# Altium PCB A10-OLinuXino-LIME.PcbDoc
Units mm, origin at the board's own origin, x right, y up, seen from the top; angles counter-clockwise.
Board outline 83.9 x 59.56 mm, 2 copper layers (Top Layer, Bottom Layer), stack 1.671 mm thick; 6 components, 0 nets, 36 pads, 0 vias.
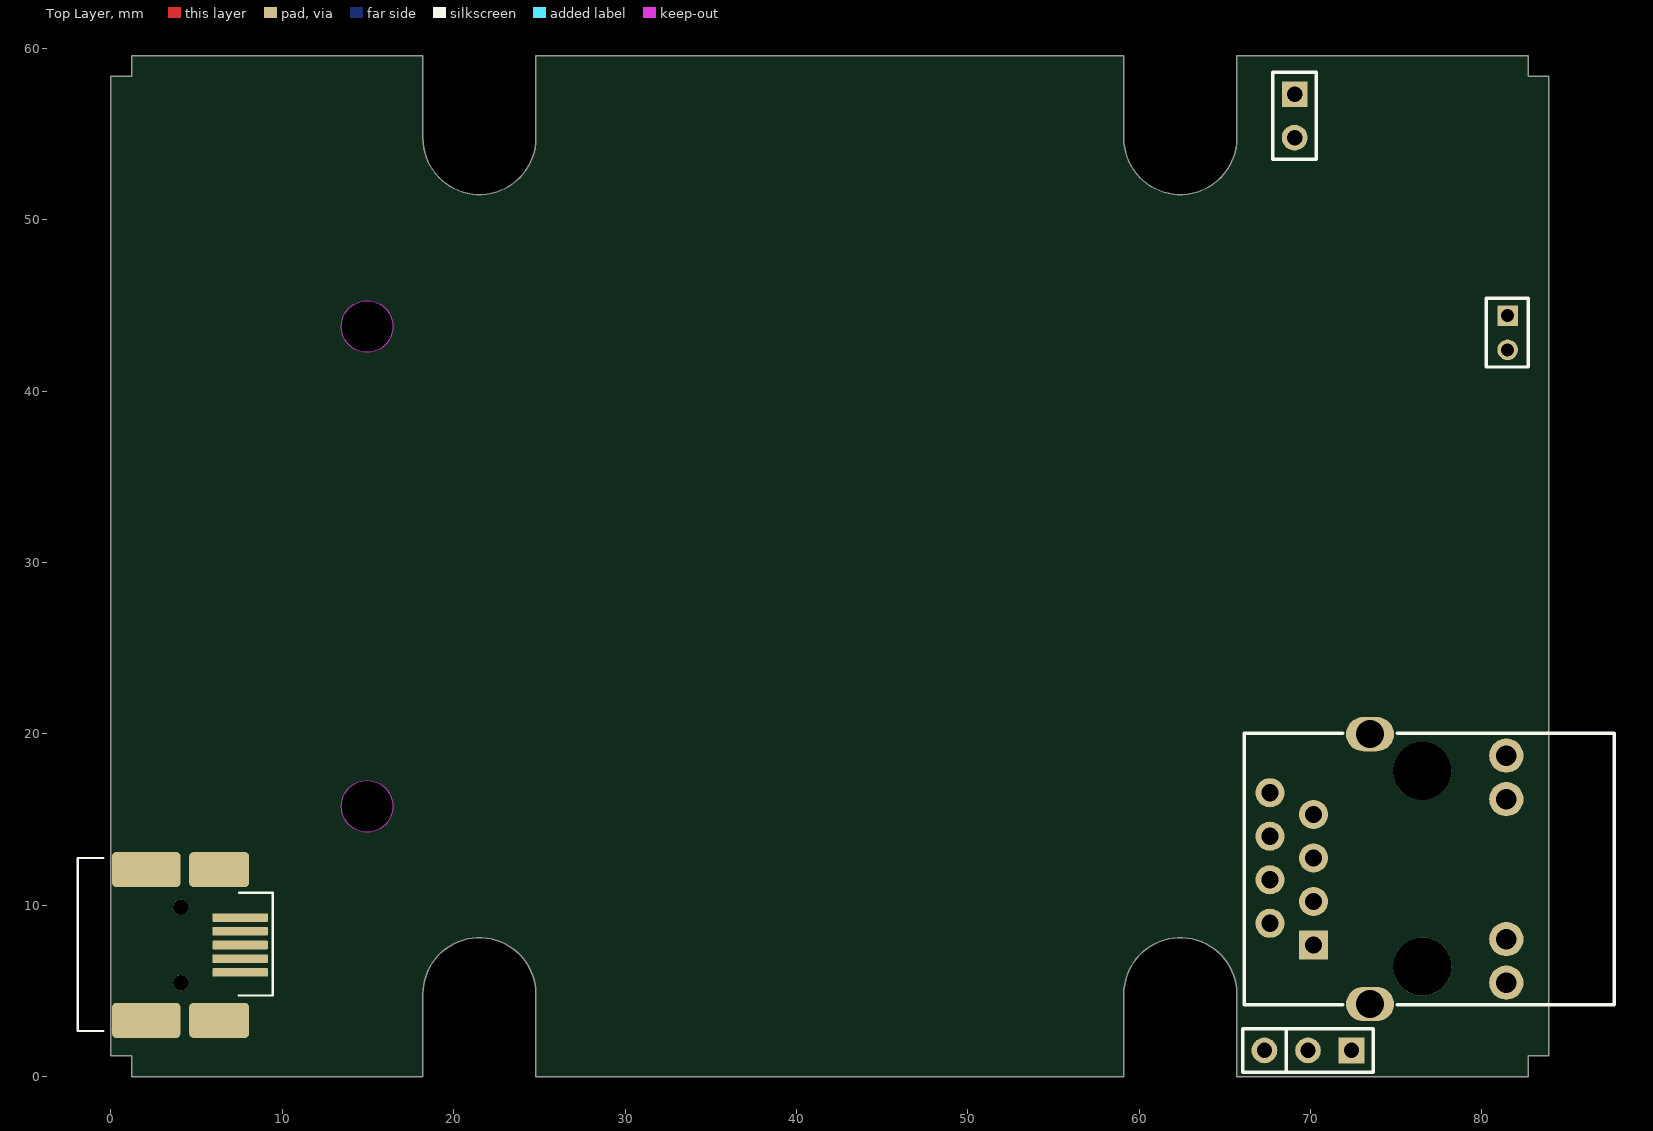
[diagram p0: Top Layer view]
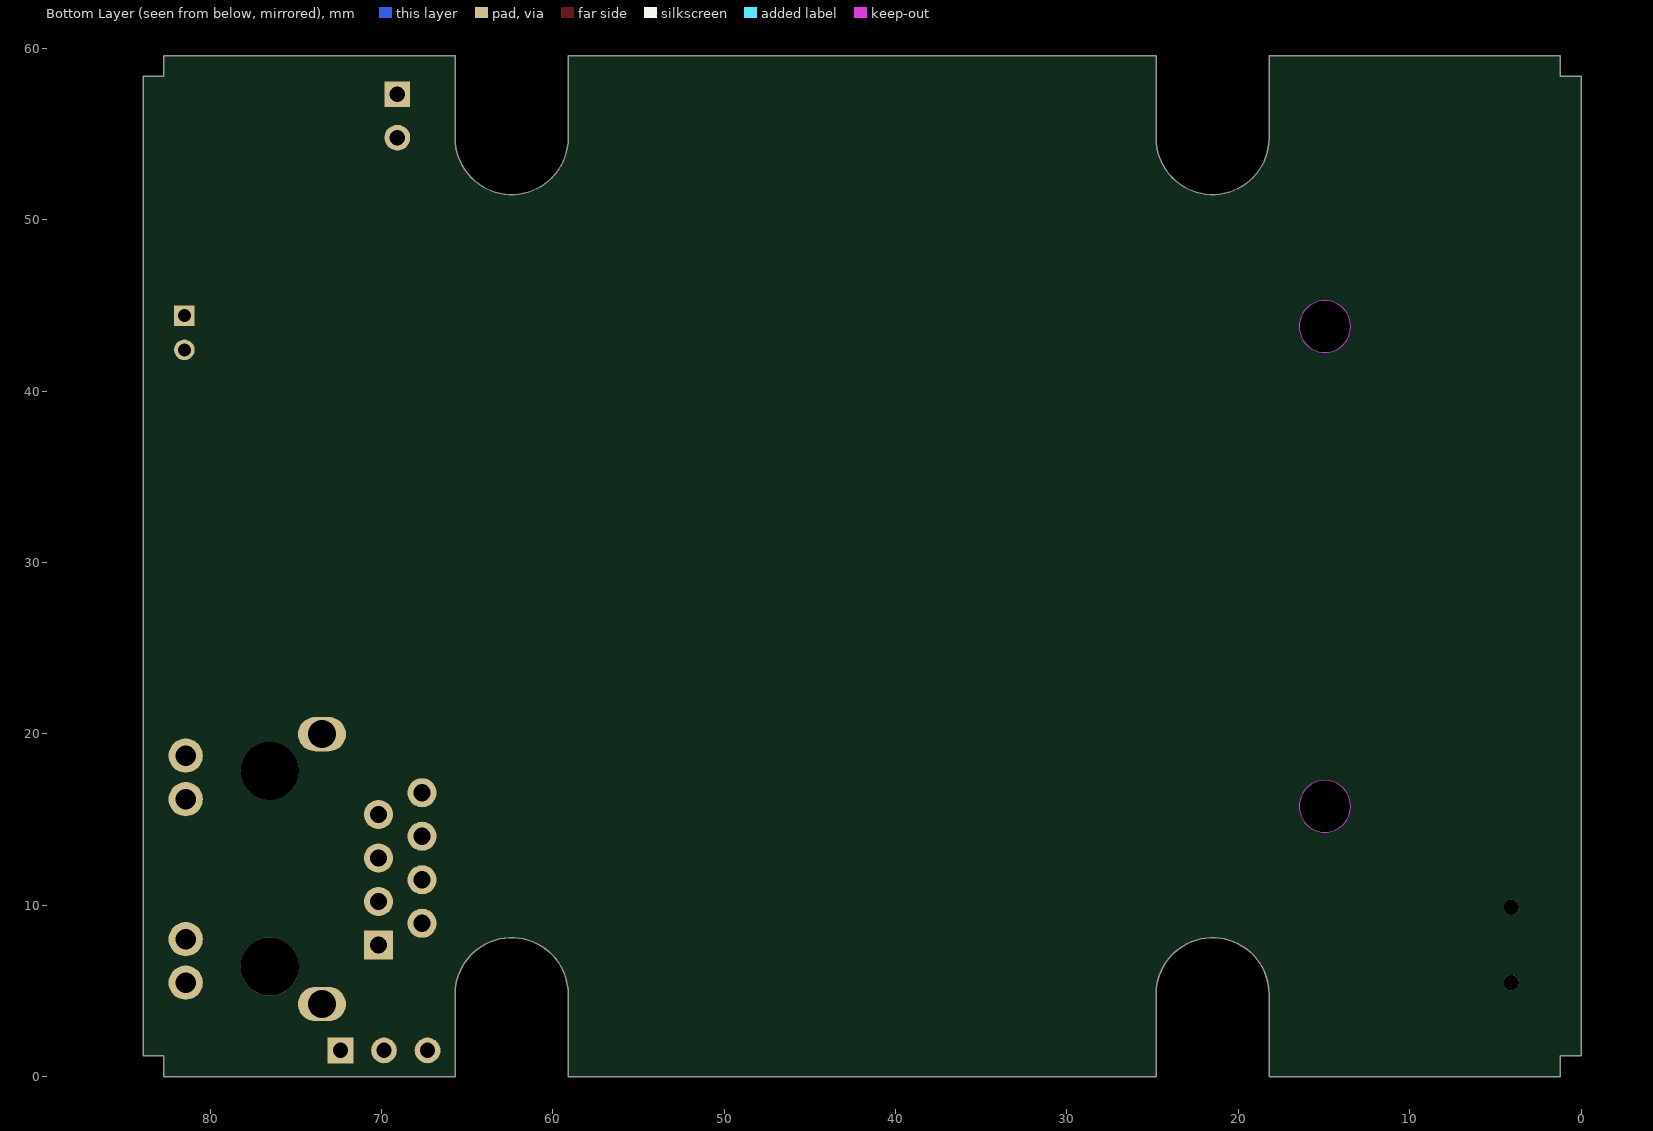
[diagram p1: Bottom Layer view, seen from below]

## Layer stack, top to bottom
Top Solder: solder mask 0.0102, Solder Resist, Dk 3.5
Top Layer: signal copper 0.0356
Dielectric 1: dielectric 1.6, FR-4, Dk 4.8
Bottom Layer: signal copper 0.0356
Bottom Solder: solder mask 0.0102, Solder Resist, Dk 3.5

## Board outline
0,1.2 1.2,1.2 1.2,0 18.2,0 18.2,4.8 cw(c21.5,4.8) 24.8,4.8 24.8,0 59.1,0 59.1,4.8 cw(c62.4,4.8) 65.7,4.8 65.7,0 82.7,0 82.7,1.2 83.9,1.2 83.9,58.363 82.7,58.363 82.7,59.563 65.7,59.563 65.7,54.763 cw(c62.4,54.763) 59.1,54.763 59.1,59.563 24.8,59.563 24.8,54.763 cw(c21.5,54.763) 18.2,54.763 18.2,59.563 1.2,59.563 1.2,58.363 0,58.363
cut-out: 16.45,15.75 cw(c14.95,15.75) 14.95,14.25 cw(c14.95,15.75) 13.45,15.75 13.45,15.775 cw(c14.95,15.775) 14.95,17.275 cw(c14.95,15.775) 16.45,15.775
cut-out: 16.45,43.75 cw(c14.95,43.75) 14.95,42.25 cw(c14.95,43.75) 13.45,43.75 13.45,43.775 cw(c14.95,43.775) 14.95,45.275 cw(c14.95,43.775) 16.45,43.775

## Design rules (kind name [scope] priority, off if disabled: settings)
AssemblyTestPointUsage [All] p1 off:
AssemblyTestpoint [All] p1 off: testpointundercomponent=TRUE minsize=1.016 maxsize=2.54 preferedsize=1.524 minholesize=0 maxholesize=1.016 preferedholesize=0.813 testpointgrid=0.025 usegrid=TRUE gridtolerance=0 allowsidetop=TRUE allowsidebottom=TRUE
Clearance [All] p1 off: gap=0.254
ComponentClearance [All] p1 off: gap=0.254 collisioncheckmode=3 verticalgap=0.254 showdistances=FALSE
DiffPairsRouting [All] p1 off: maxlimit=0.254 minlimit=0.254 mostfreqgap=0.254 toplayer_minwidth=0.381 toplayer_maxwidth=0.381 toplayer_prefwidth=0.381 bottomlayer_minwidth=0.381 bottomlayer_maxwidth=0.381 bottomlayer_prefwidth=0.381 maxuncoupledlength=12.7
FabricationTestPointUsage [All] p1 off: valid=0 allowmultiple=FALSE
FabricationTestpoint [All] p1 off: side=3 testpointundercomponent=TRUE minsize=1.016 maxsize=2.54 preferedsize=1.524 minholesize=0 maxholesize=1.016 preferedholesize=0.813 testpointgrid=0.025 allowsidetop=TRUE allowsidebottom=TRUE usegrid=TRUE gridtolerance=0
FanoutControl Fanout_BGA [IsBGA] p1 off: bgadir=Out bgaviamode=Centered fanoutstyle=Auto fanoutdirection=Alternating viagrid=0.025 // Fanout_BGA (Default Rule)
FanoutControl Fanout_LCC [IsLCC] p2 off: bgadir=Out bgaviamode=Centered fanoutstyle=Auto fanoutdirection=Alternating viagrid=0.025 // Fanout_LCC (Default Rule)
FanoutControl Fanout_SOIC [IsSOIC] p3 off: bgadir=Out bgaviamode=Centered fanoutstyle=Auto fanoutdirection=Alternating viagrid=0.025 // Fanout_SOIC (Default Rule)
FanoutControl Fanout_Small [(CompPinCount < 5)] p4 off: bgadir=Out bgaviamode=Centered fanoutstyle=Auto fanoutdirection=OutThenIn viagrid=0.025 // Fanout_Small (Default Rule)
FanoutControl Fanout_Default [All] p5 off: bgadir=Out bgaviamode=Centered fanoutstyle=Auto fanoutdirection=Alternating viagrid=0.025 // Fanout_Default (Default Rule)
Height [All] p1 off: minheight=0 maxheight=25.4 prefheight=12.7
HoleSize [All] p1 off: absolutevalues=TRUE maxlimit=2.54 minlimit=0.025 maxpercent=80.000 minpercent=20.000
HoleToHoleClearance [All] p1 off: gap=0.254 allowstackedmicrovias=TRUE
LayerPairs [All] p1 off: enforce=TRUE
MinimumSolderMaskSliver [All] p1 off: minsoldermaskwidth=0.254
NetAntennae [All] p1 off: netantennaetolerance=0
PasteMaskExpansion [All] p1 off: expansion=0
PlaneClearance [All] p1 off: clearance=0.508
PlaneConnect [All] p1 off: planeconnectstyle=Relief reliefexpansion=0.508 reliefentries=4 reliefconductorwidth=0.254 reliefairgap=0.254
PolygonConnect [All] p1 off: connectstyle=Relief reliefconductorwidth=0.254 reliefentries=4 polygonreliefangle="90 Angle" airgapwidth=0.254
RoutingCorners [All] p1 off: cornerstyle=45-Degree minsetback=2.54 maxsetback=2.54
RoutingLayers [All] p1 off: top layer_v5=TRUE bottom layer_v5=TRUE
RoutingPriority [All] p1 off: routingpriority=0
RoutingTopology [All] p1 off: topology=Shortest
RoutingVias [All] p1 off: holewidth=0.711 width=1.27 viastyle="Through Hole" minholewidth=0.711 minwidth=1.27 maxholewidth=0.711 maxwidth=1.27
ShortCircuit [All] p1 off: allowed=FALSE
SilkToBoardRegionClearance [All] p1 off:
SilkToSilkClearance [All] p1 off: silktosilkclearance=0.254
SilkToSolderMaskClearance [IsPad] p1 off: minsilkscreentomaskgap=0.254 clearancetoexposedcopper=TRUE
SolderMaskExpansion [All] p1 off: expansion=0.102
UnRoutedNet [All] p1 off:
UnpouredPolygon [All] p1 off:
Width [All] p1 off: maxlimit=0.254 minlimit=0.254 preferedwidth=0.254

## Components (designator, comment, footprint, x,y, rotation, side; value= is the part's Value field where it differs from the comment)
? "Comment" PLS-2-3D 72.39,1.52 r180 top locked
? "Comment" PLS-2-2 81.5,44.403 r180 top locked
? "Comment" PLS-2-3D 69.07,57.323 r270 top locked
? "Comment" USB_Mini-B_Molex_SMT 4.8,7.675 r0 top locked
? "Comment" "RJ-45 - HR911105A" 74.525,12.1 r270 top locked
? "Comment" PLS-3-3D 72.39,1.52 r180 top locked

## Footprints (in the part's own frame and the unit in brackets; to place one, negate y for a bottom-side part, rotate by r counter-clockwise, add the part's x,y. Pads: shape width x height; smd on the part's side, far side on the other; paste and mask are expansions set on the pad)
PLS-2-2 [mm] "Connector; Header; 1x2 Position"
  rect 1.2x1.2 hole 0.75: 1(0,0)
  round 1.2 hole 0.75: 2(0,2)
  silkscreen extent -1.2,-1 1.25,3
PLS-2-3D [mm] "Connector; Header; 2 Position"
  rect 1.5x1.5 hole 0.9: 1(0,0)
  round 1.5 hole 0.9: 2(2.54,0)
  silkscreen extent -1.27,-1.27 3.81,1.27, body extent -1.27,-1.27 3.81,1.27, height 8.44
PLS-3-3D [mm] "Connector; Header; 3 Position"
  rect 1.5x1.5 hole 0.9: 1(0,0)
  round 1.5 hole 0.9: 2(2.54,0) 3(5.08,0)
  silkscreen extent -1.27,-1.27 6.35,1.27, body extent -1.27,-1.27 6.35,1.27, height 8.44
"RJ-45 - HR911105A" [mm] "Ethernet connector"
  round 3.4 hole 3.4 unplated: 0(-5.745,1.995) 0(5.685,1.995)
  rect 1.7x1.7 hole 1: 1(4.43,-4.355)
  round 1.7 hole 1: 2(3.16,-6.895) 3(1.89,-4.355) 4(0.62,-6.895) 5(-0.65,-4.355) 6(-1.92,-6.895) 7(-3.19,-4.355) 8(-4.46,-6.895)
  round 2 hole 1.2: 9(6.625,6.895) 10(4.085,6.895) 11(-4.085,6.895) 12(-6.625,6.895)
  oval 2x2.8 hole 1.63: 13(-7.875,-1.055) 13(7.875,-1.055)
  silkscreen extent -7.92,-8.39 7.91,13.2, body extent -7.97,-8.45 7.91,12.94, height 13.6
USB_Mini-B_Molex_SMT [mm]
  rrect25% 3.25x0.5 smd: 1(2.738,1.6) 2(2.738,0.8) 3(2.738,0) 4(2.738,-0.8) 5(2.738,-1.6)
  rrect25% 4x2.05 smd: 5(-2.737,-4.4) 5(-2.737,4.4)
  rrect25% 3.5x2.05 smd: 5(1.513,-4.4) 5(1.513,4.4)
  round 0.9 hole 0.9 unplated: H1(-0.737,2.2) H2(-0.737,-2.2)
  silkscreen extent -6.74,-5.02 4.64,5.08, body extent -6.66,-4.93 2.59,4.98, height 3.93

## Nets (pads, with @x,y where several pads share a name; then routed paths per layer and width w, separated by ;. In a path a pad name is that pad's centre, name@x,y a point inside that pad or via, vN(x,y) a via of type N, cw(c..) or ccw(c..) an arc to the next point about the centre after c; other vN are vias at no path point)
pads on no net: ?.0 ?.1 ?.2 ?.3 ?.4 ?.5 ?.6 ?.7 ?.8 ?.9 ?.10 ?.11 ?.12 ?.13 ?.H1 ?.H2

## Silkscreen, mask and mechanical layers (free items; w line width, h text height)
Mechanical 3:
  circle w0.2: c14.95,15.763 r1.5
  circle w0.2: c14.95,43.763 r1.5
  lines w0.2: 1.2,0 1.2,0 ; 1.2,0 18.2,0 18.2,4.8 cw(c21.5,4.8) 24.8,4.8 24.8,0 59.1,0 59.1,4.8 cw(c62.4,4.8) 65.7,4.8 65.7,0 82.7,0 ; 1.2,0 1.2,1.2 0,1.2 0,58.363 1.2,58.363 1.2,59.563 ; 1.2,59.563 18.2,59.563 18.2,54.763 ccw(c21.5,54.763) 24.8,54.763 24.8,59.563 59.1,59.563 59.1,54.763 ccw(c62.4,54.763) 65.7,54.763 65.7,59.563 82.7,59.563 ; 1.2,59.563 1.2,59.563 ; 82.7,0 82.7,1.2 83.9,1.2 83.9,58.363 82.7,58.363 82.7,59.563 ; 82.7,0 82.7,0 ; 82.7,59.563 82.7,59.563